# EAGLE board NOT gate (EAGLE 9.7.0)

Size 85.55 x 52.88 mm. Coordinates in mm from the lower left corner, seen from the top.
Outline: 0,0 85.55,0 85.55,52.88 0,52.88 0,0
Copper layers (1*16): Top 0.035mm / dielectric 1.5mm / Bottom 0.035mm
Design rules "default": minimum track width 6mil, minimum drill 0.35mm, track to track 6mil, track to pad 6mil, pad to pad 6mil, via to via 6mil, smd to smd 6mil, copper to edge 40mil, drill to drill 6mil, minimum pad ring 10mil, minimum via ring 8mil, stop-mask expansion 4mil, vias tented up to drill 0mil, thermal gap 10mil

## Footprints (pad centres in the part's own frame; a part is rotated, then mirrored left to right if it is on the bottom)
BAT_3002 = smd 3.96 x 3.96: N 0,0.65 | smd 5.08 x 5.08: P 12.825,0.65; P1 -12.825,0.65
LEDRD254W60D565H860B = drill 0.981 pad 1.581: 1 -1.27,0; 2 1.27,0
SWITCH-SPDT-PTH-8.5X3.7MM = drill 1.016 pad 1.88: 1 -2.54,0; 2 0,0; 3 2.54,0
DIP762W53P254L1969H508Q14B = drill 0.743 pad 1.343: 1 -3.81,7.62; 2 -3.81,5.08; 3 -3.81,2.54; 4 -3.81,0; 5 -3.81,-2.54; 6 -3.81,-5.08; 7 -3.81,-7.62; 8 3.81,-7.62; 9 3.81,-5.08; 10 3.81,-2.54; 11 3.81,0; 12 3.81,2.54; 13 3.81,5.08; 14 3.81,7.62

## Placement (x,y rotation side)
BAT2  BR2016  [BAT_3002]  15.76,32.69 90 top
D1  RED  [LEDRD254W60D565H860B]  66.81,7.91 0 top
S1  TOGGLE  [SWITCH-SPDT-PTH-8.5X3.7MM]  55.38,33.31 0 top
U1  74HC04_PDIP  [DIP762W53P254L1969H508Q14B]  70.62,21.88 90 top

## Library data of the parts
BAT2 = Tinkercad; CATEGORY: Battery-Holder; CELL_DIAMETER: 20mm; DESCRIPTION: Battery Retainer Coin, 20.0mm 1 Cell SMD (SMT) Tab; MANUFACTURER: Keystone Electronics; MPN: 3002; PART_STATUS: ACTIVE; ROHS_COMPLIANT: COMPLIANT; SERIES: -; SUB_CATEGORY: Holder; TYPE: Coin Cell
D1 = Tinkercad; CATEGORY: Opto-Electronic; SUB-CATEGORY: LED; VALUE: LED_RED
S1 U1 = Tinkercad

## Nets
BAT2+: BAT2.P BAT2.P1 S1.1 U1.14
BAT2-: BAT2.N D1.2 U1.3 U1.7
U1_1A: S1.2 U1.1
U1_1Y: D1.1 U1.2

## Tracks (layer width: path | path; a pad name or v marks a point on that pad's centre or on a via)
BAT2+  (3 unrouted)
BAT2-  (3 unrouted)
U1_1A  (1 unrouted)
U1_1Y  (1 unrouted)